# EAGLE board Schem_5_breakout (EAGLE 9.2.1)
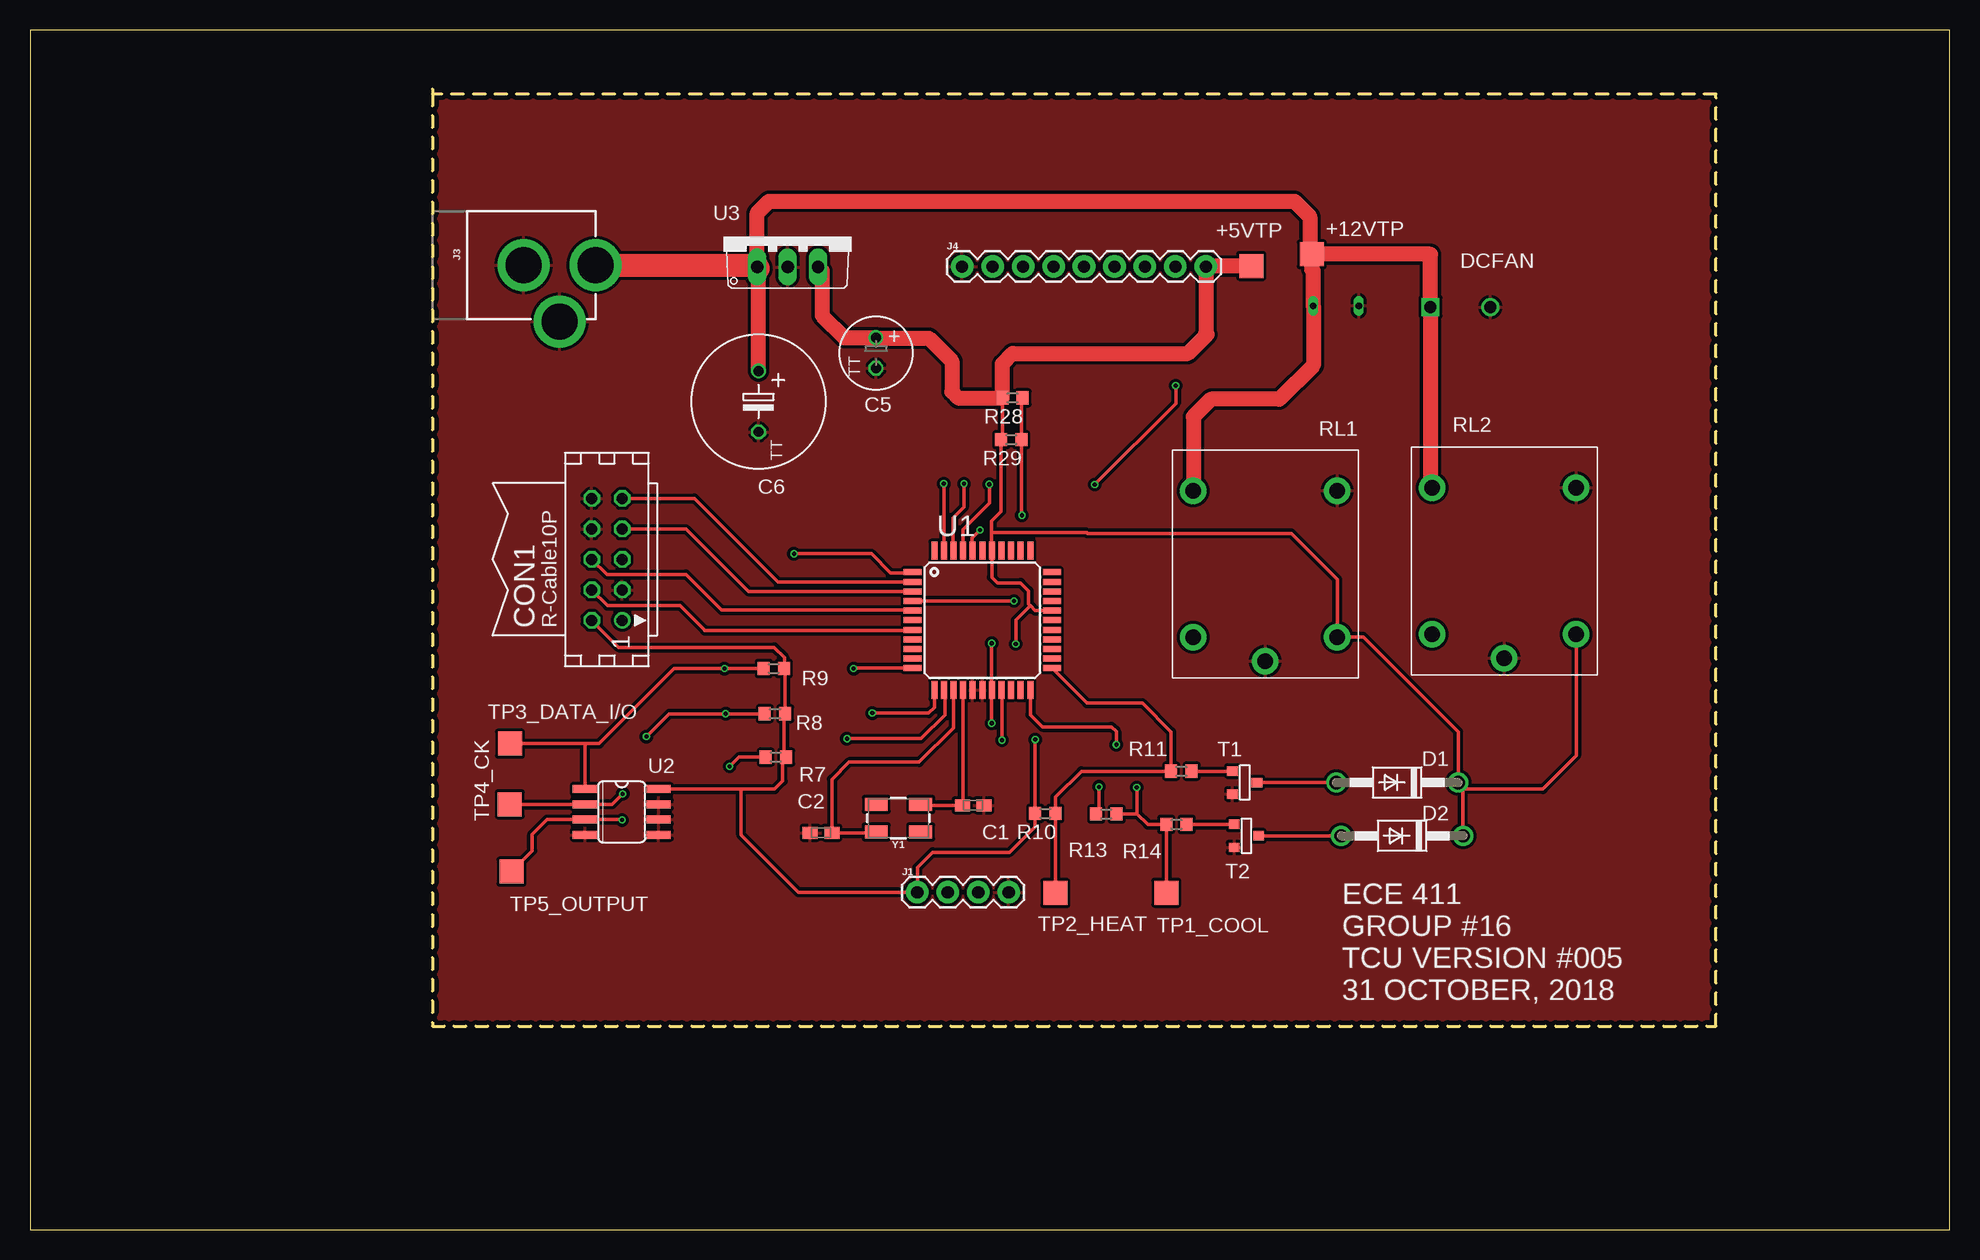
[diagram p0: board, top side]
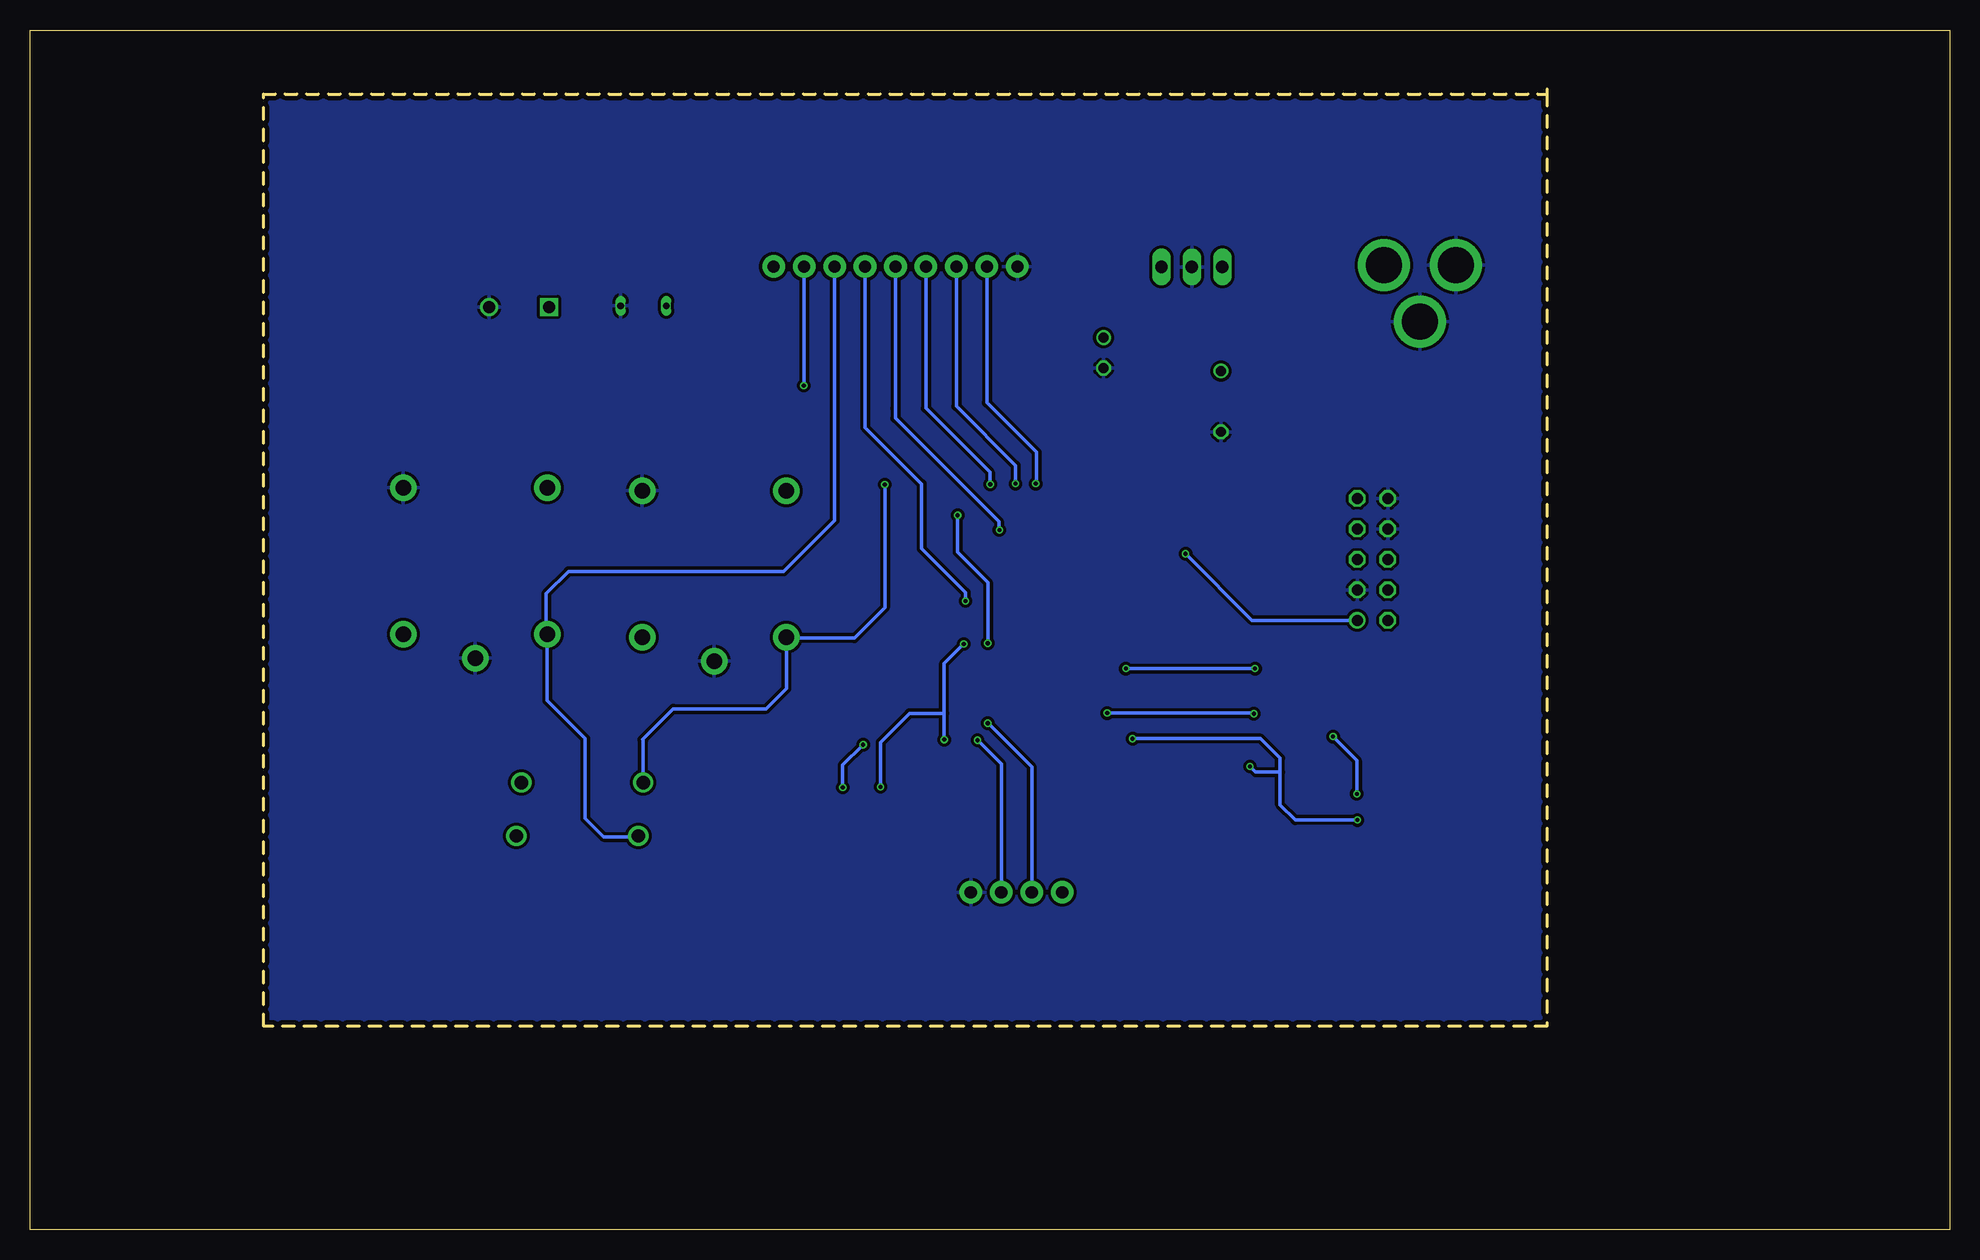
[diagram p1: board, bottom side, seen from below]

Size 160 x 100 mm. Coordinates in mm from the lower left corner, seen from the top.
Outline: 33.55,95.1 33.55,94.67
Outline: 33.55,94.67 33.55,16.94 140.54,16.94 140.54,94.67 33.55,94.67
Outline: 0,0 160,0 160,100 0,100 0,0
Copper layers (1*16): Top 0.035559375mm / dielectric 1.6mm / Bottom 0.035559375mm
Design rules "2LAYER": minimum track width 6mil, minimum drill 10mil, track to track 6mil, track to pad 6mil, pad to pad 6mil, via to via 6mil, smd to smd 6mil, copper to edge 15mil, drill to drill 6mil, minimum pad ring 5mil, minimum via ring 5mil, stop-mask expansion 2.5mil, vias tented up to drill 0mil, thermal gap 10mil

## Footprints (pad centres in the part's own frame; a part is rotated, then mirrored left to right if it is on the bottom)
TP20SQ = smd 2 x 2: TP 0,0
RESC0603_M = smd 1.25 x 1: 1 -0.9,0; 2 0.9,0
TT2D6 = drill 0.813: + -1.27,0 | drill 0.813 octagon: - 1.27,0
TT5D11 = drill 0.813: + -2.54,0 | drill 0.813 octagon: - 2.54,0
CON10 = drill 0.914: 1 -5.08,-1.27 | drill 0.914 octagon: 2 -5.08,1.27; 3 -2.54,-1.27; 4 -2.54,1.27; 5 0,-1.27; 6 0,1.27; 7 2.54,-1.27; 8 2.54,1.27; 9 5.08,-1.27; 10 5.08,1.27
DO41-10 = drill 1.118: A 5.08,0; C -5.08,0
FAN = drill 1 square: + -2.5,0 | drill 1: - 2.5,0
1X04 = drill 1.016 pad 1.88: 1 0,0; 2 2.54,0; 3 5.08,0; 4 7.62,0
POWER_JACK_PTH = drill 2.997 pad 4.318: GND 0,7.7; GNDBREAK 4.7,10.7; PWR 0,13.7
1X09 = drill 1.016 pad 1.88: 1 0,0; 2 2.54,0; 3 5.08,0; 4 7.62,0; 5 10.16,0; 6 12.7,0; 7 15.24,0; 8 17.78,0; 9 20.32,0
R0603 = smd 1 x 1.1: 1 -0.85,0; 2 0.85,0
T073 = drill 1.3 pad 2.2: 1 6.1,6; 2 6.1,-6; 3 8.1,0; 4 -6.1,6; 5 -6.1,-6
SOT-23 = smd 0.787 x 0.889: 1 0.025,-1.016; 2 -0.94,1.016; 3 0.991,1.016
TQFP44 = smd 1.5 x 0.5: 1 -5.8,4; 2 -5.8,3.2; 3 -5.8,2.4; 4 -5.8,1.6; 5 -5.8,0.8; 6 -5.8,0; 7 -5.8,-0.8; 8 -5.8,-1.6; 9 -5.8,-2.4; 10 -5.8,-3.2; 11 -5.8,-4; 23 5.8,-4; 24 5.8,-3.2; 25 5.8,-2.4; 26 5.8,-1.6; 27 5.8,-0.8; 28 5.8,0; 29 5.8,0.8; 30 5.8,1.6; 31 5.8,2.4; 32 5.8,3.2; 33 5.8,4 | smd 0.5 x 1.5: 12 -4,-5.8; 13 -3.2,-5.8; 14 -2.4,-5.8; 15 -1.6,-5.8; 16 -0.8,-5.8; 17 0,-5.8; 18 0.8,-5.8; 19 1.6,-5.8; 20 2.4,-5.8; 21 3.2,-5.8; 22 4,-5.8; 34 4,5.8; 35 3.2,5.8; 36 2.4,5.8; 37 1.6,5.8; 38 0.8,5.8; 39 0,5.8; 40 -0.8,5.8; 41 -1.6,5.8; 42 -2.4,5.8; 43 -3.2,5.8; 44 -4,5.8
SO08 = smd 0.66 x 2.032: 1 -1.905,-3.073; 2 -0.635,-3.073; 3 0.635,-3.073; 4 1.905,-3.073; 5 1.905,3.073; 6 0.635,3.073; 7 -0.635,3.073; 8 -1.905,3.073
TO220V = drill 1.016 long: 1 -2.54,-2.54; 2 0,-2.54; 3 2.54,-2.54
JUMPER2 = drill 0.55 long: 1 0,3.81; 2 0,0
CRYSTAL-SMD-5X3.2-4PAD = smd 1.9 x 1.1: 1 -1.85,-1.15; 2 1.85,-1.15; 3 1.85,1.15; 4 -1.85,1.15

## Placement (x,y rotation side)
+5VTP  TPSTP20SQ  [TP20SQ]  101.81,80.33 0 top
+12VTP  TPSTP20SQ  [TP20SQ]  106.84,81.3 0 top
C1  27 pF  [RESC0603_M]  78.61,35.37 180 top
C2  27 pF  [RESC0603_M]  65.93,33.08 0 top
C5  10 uF  [TT2D6]  70.52,73.08 270 top
C6  470 uF  [TT5D11]  60.73,69.03 270 top
CON1  TEC 5103308-01  [CON10]  48.1,55.87 90 top
D1  1N4004  [DO41-10]  113.97,37.27 180 top
D2  1N4004  [DO41-10]  114.38,32.81 180 top
DCFAN  FAN  [FAN]  119.24,76.91 0 top
J1  [1X04]  73.96,28.11 0 top
J3  POWER_JACK  [POWER_JACK_PTH]  33.45,80.4 270 top
J4  [1X09]  77.69,80.28 0 top
R7  10k  [R0603]  62.17,39.38 180 top
R8  10k  [R0603]  62.09,43 180 top
R9  10k  [R0603]  62,46.77 180 top
R10  1K  [R0603]  84.62,34.68 180 top
R11  2.2K  [R0603]  95.97,38.21 180 top
R13  1K  [R0603]  89.71,34.63 180 top
R14  2.2K  [R0603]  95.56,33.77 180 top
R28  10k  [R0603]  81.89,69.33 180 top
R29  10k  [R0603]  81.79,65.84 180 top
RL1  JQC-3F  [T073]  102.97,55.49 270 top
RL2  JQC-3F  [T073]  122.89,55.74 270 top
T1  2N2222  [SOT-23]  101.25,37.24 90 top
T2  2N2222  [SOT-23]  101.39,32.79 90 top
TP1_COOL  TPSTP20SQ  [TP20SQ]  94.71,28.07 0 top
TP2_HEAT  TPSTP20SQ  [TP20SQ]  85.48,28.06 0 top
TP3_DATA_I/O  TPSTP20SQ  [TP20SQ]  40,40.51 180 top
TP4_CK  TPSTP20SQ  [TP20SQ]  39.99,35.44 180 top
TP5_OUTPUT  TPSTP20SQ  [TP20SQ]  40.13,29.84 0 top
U1  AT89S52  [TQFP44]  79.38,50.8 0 top
U2  DS1621S  [SO08]  49.33,34.81 270 top
U3  7805TV  [TO220V]  63.16,82.78 0 top
U$18  LIGHTBULB  [JUMPER2]  110.77,77.02 90 top
Y1  12MHz  [CRYSTAL-SMD-5X3.2-4PAD]  72.39,34.29 180 top

## Library data of the parts
+5VTP +12VTP TP1_COOL TP2_HEAT TP3_DATA_I/O TP4_CK TP5_OUTPUT = testpad
C1 C2 = Nordic_nRF
C5 C6 = rcl; SPICEPREFIX: C
CON1 = con-harting; OC_FARNELL: unknown; OC_NEWARK: unknown
D1 D2 = diode
DCFAN = FAN
J1 = SparkFun-Connectors; PROD_ID: CONN-09696
J3 = SparkFun-Connectors; PROD_ID: CONN-08197
J4 = SparkFun-Connectors
R7-R11 R13 R14 R28 R29 = audio amplifier example
RL1 RL2 = JQC-3F
T1 T2 = zetex; MPN: DSS20201L-7; OC_FARNELL: 1710688; OC_NEWARK: 25R4555
U1 = atmel; OC_FARNELL: unknown; OC_NEWARK: unknown
U2 = maxim; MF: DALLAS SEMICONDUCTOR; MPN: DS1621S+; OC_FARNELL: 9725261; OC_NEWARK: 23K3501
U3 = linear
U$18 = LIGHTBULB
Y1 = SparkFun-Clocks; PROD_ID: XTAL-08297

## Nets
+5V: +5VTP.TP C5.+ CON1.2 D1.C D2.C J1.1 J4.9 R7.1 R8.1 R9.1 R10.2 R13.2 R28.2 R29.2 RL1.1 RL2.1 U1.29 U1.38 U2.8 U3.3
+12V: +12VTP.TP C6.+ DCFAN.+ J3.PWR RL1.5 RL2.5 U3.1 U$18.1
FANLED: D2.A J4.7 RL2.2 T2.1
GND: C1.1 C2.1 C5.- C6.- CON1.3 CON1.8 CON1.10 DCFAN.- J1.4 J3.GND J3.GNDBREAK J4.1 RL1.3 RL1.4 RL2.3 RL2.4 T1.2 T2.2 U1.16 U1.17 U2.4 U2.5 U2.6 U2.7 U3.2 U$18.2
LBLED: D1.A J4.8 RL1.2 T1.1
MISO: CON1.9 U1.2
MOSI: CON1.1 U1.1
N$1: C1.2 U1.15 Y1.1
N$2: C2.2 U1.14 Y1.3
N$3: J1.2 R28.1 R29.1 U1.18
N$4: J1.3 U1.19
N$9: R7.2 TP5_OUTPUT.TP U1.13 U2.3
N$10: R8.2 TP4_CK.TP U1.12 U2.2
N$11: R9.2 TP3_DATA_I/O.TP U1.11 U2.1
N$12: R10.1 R11.2 TP2_HEAT.TP U1.23
N$13: R11.1 T1.3
N$16: R13.1 R14.2 TP1_COOL.TP U1.22
N$17: R14.1 T2.3
N$33: J4.6 U1.4
N$34: J4.5 U1.40
N$35: J4.4 U1.41
N$36: J4.3 U1.42
N$37: J4.2 U1.43
RST: CON1.5
RXD: CON1.6 U1.5
SCK: CON1.7 U1.3
TXD: CON1.4 U1.7

## Tracks (layer width: path | path; a pad name or v marks a point on that pad's centre or on a via)
+5V  (via drill 0.35)
  Top 0.305: 80.16,58.09 80.16,59.08 80.94,59.86 R29.2 81.05,65.95 R28.2 | 80.16,58.09 80.16,56.61 U1.38 80.17,54.37 80.64,53.9 82.58,53.9 83.24,53.24 83.24,52.15 83.38,52.01 | 80.16,58.09 88.09,58.09 88.14,58.04 105.13,58.04 108.97,54.2 RL1.1 108.98,49.4 111.12,49.4 119.05,41.48 D1.C | U1.29 83.78,51.6 83.38,52.01 | CON1.2 49.08,48.54 62.03,48.54 62.89,47.68 62.89,46.81 R9.1 62.95,46.68 R8.1 62.84,42.9 62.84,39.56 | 62.84,39.56 62.95,39.46 R7.1 | 62.84,39.56 62.74,39.66 62.74,37.39 62.07,36.72 59.21,36.72 | U2.8 59.21,36.72 | 59.21,36.72 59.28,36.64 59.28,32.89 64.06,28.11 J1.1 73.96,30.17 75.23,31.45 81.64,31.45 83.77,33.58 R10.2 83.77,40.82 v83.8,40.84 | v82.17,48.82 82.17,50.8 83.38,52.01 | v89.1,36.91 89.1,34.88 R13.2 | D2.C 119.45,37.27 D1.C | RL2.1 128.88,39.5 126.11,36.73 119.58,36.73 D1.C
  Top 1.27: U3.3 66.04,79.91 66.04,76.2 67.89,74.35 C5.+ 70.57,74.3 74.93,74.3 76.83,72.39 76.83,69.85 77.36,69.33 R28.2 81.05,72.16 81.92,73.03 96.52,73.03 98.11,74.61 98.02,74.7 J4.9 98.06,80.33 +5VTP.TP
  Bottom 0.305: v83.8,40.84 83.8,43.03 | 83.8,43.03 83.8,47.19 v82.17,48.82 | 83.8,43.03 86.69,43.03 89.1,40.62 v89.1,36.91
+12V
  Top 1.27: C6.+ 60.73,80.14 U3.1 60.62,84.75 61.59,85.72 105.41,85.72 106.68,84.45 106.68,81.46 +12VTP.TP | +12VTP.TP 106.84,80.03 106.96,79.91 U$18.1 106.96,72.03 104.14,69.22 98.42,69.22 96.97,67.76 RL1.5 | RL2.5 117.02,61.98 116.74,61.98 DCFAN.+ 116.74,81.3 +12VTP.TP
  Top 1.905: J3.PWR 60.47,80.4 60.73,80.14
FANLED
  Top 0.305: T2.1 D2.A
  Bottom 0.305: J4.7 92.94,59.11 97.18,54.86 115.11,54.86 116.97,53.01 116.97,49.72 RL2.2 116.89,44.09 113.72,40.92 113.72,34.27 112.19,32.74 109.12,32.74 109.07,32.79 109.27,32.79 D2.A
GND
  pour Bottom (isolate 0.254): 31.18,95.98 31.18,15.64 141.63,15.64 141.63,96.2 31.18,96.2
  pour Top (isolate 0.254): 32.79,16.13 141.4,16.13 141.4,20.9 141.4,95.55 140.74,95.55 32.79,95.55 32.79,95
LBLED  (via drill 0.35)
  Top 0.305: v95.5,70.36 95.5,68.86 v88.75,62.1 | D1.A T1.1
  Bottom 0.305: J4.8 95.47,70.39 v95.5,70.36 | v88.75,62.1 88.75,51.84 91.29,49.3 96.88,49.3 96.9,49.32 | 96.9,49.32 RL1.2 | D1.A 108.89,40.79 108.94,40.84 106.38,43.41 98.63,43.41 96.95,45.09 96.95,49.28 96.9,49.32
MISO
  Top 0.305: CON1.9 55.39,60.95 62.36,53.98 73.55,53.98 U1.2
MOSI  (via drill 0.35)
  Top 0.305: v63.68,56.34 70.13,56.34 71.73,54.74 73.51,54.74 U1.1
  Bottom 0.305: CON1.1 58.13,50.78 v63.68,56.34
N$1
  Top 0.305: Y1.1 74.31,35.37 C1.2 77.78,35.44 U1.15
N$2
  Top 0.305: Y1.3 70.48,33.08 C2.2 66.83,37.52 68.28,38.96 74.12,38.96 76.97,41.82 U1.14
N$3  (via drill 0.35)
  Top 0.305: v82.68,59.54 82.64,59.58 R29.1 82.64,69.33 R28.1 | v80.16,48.87 80.16,45.01 | 80.16,45.01 U1.18 | v80.16,42.22 80.16,45.01
  Bottom 0.305: v82.68,59.54 82.68,56.46 80.16,53.95 v80.16,48.87 | J1.2 76.5,38.55 v80.16,42.22
N$4  (via drill 0.35)
  Top 0.305: v81.03,40.79 81.03,44.95 U1.19
  Bottom 0.305: J1.3 79.04,38.81 v81.03,40.79
N$9  (via drill 0.35)
  Top 0.305: TP5_OUTPUT.TP 41.86,31.58 41.86,32.94 43.09,34.18 U2.3 49.31,34.18 v49.35,34.14 | v68.1,40.92 74.27,40.92 76.25,42.9 76.25,44.92 U1.13 | R7.2 59.09,39.38 v58.32,38.61
  Bottom 0.305: v49.35,34.14 54.53,34.14 55.8,35.41 55.8,38.12 | 55.8,38.12 55.8,39.29 57.43,40.92 v68.1,40.92 | v58.32,38.61 57.84,38.12 55.8,38.12
N$10  (via drill 0.35)
  Top 0.305: TP4_CK.TP U2.2 | U2.2 | R8.2 v57.99,43 53.29,43 v51.38,41.1 | v49.4,36.32 48.53,35.45 U2.2 | U1.12 75.38,43.52 74.91,43.05 v70.21,43.05
  Bottom 0.305: v51.38,41.1 49.4,39.12 v49.4,36.32 | v70.21,43.05 58.04,43.05 v57.99,43
N$11  (via drill 0.35)
  Top 0.305: TP3_DATA_I/O.TP 46.3,40.52 | 46.3,40.52 47.45,40.52 53.7,46.76 v57.89,46.76 R9.2 | U2.1 46.25,40.46 46.3,40.52 | U1.11 68.69,46.8 v68.66,46.76
  Bottom 0.305: v68.66,46.76 v57.89,46.76
N$12
  Top 0.305: TP2_HEAT.TP R10.1 85.47,36.04 87.63,38.21 R11.2 95.11,41.49 92.71,43.89 88.08,43.89 U1.23
N$13
  Top 0.305: R11.1 100.22,38.21 T1.3
N$16  (via drill 0.35)
  Top 0.305: TP1_COOL.TP R14.2 94.7,33.76 93.17,33.76 92.29,34.63 | R13.1 92.29,34.63 | U1.22 83.38,42.91 84.38,41.91 90.14,41.91 90.55,41.5 v90.55,40.41 | v92.25,36.85 92.25,34.67 92.29,34.63
  Bottom 0.305: v90.55,40.41 92.25,38.71 v92.25,36.85
N$17
  Top 0.305: R14.1 100.36,33.77 T2.3
N$33  (via drill 0.35)
  Top 0.305: v82.02,52.4 U1.4 | U1.4
  Bottom 0.305: J4.6 90.39,66.88 85.67,62.15 85.67,56.77 82.02,53.11 v82.02,52.4
N$34  (via drill 0.35)
  Top 0.305: v79.2,58.32 78.54,57.66 78.54,56.64 U1.40
  Bottom 0.305: J4.5 87.86,68.46 87.86,68.45 87.86,67.64 79.25,59.03 79.25,58.37 v79.2,58.32
N$35  (via drill 0.35)
  Top 0.305: v79.96,62.13 79.96,60.55 77.78,58.37 U1.41
  Bottom 0.305: J4.4 85.31,68.47 79.98,63.14 79.98,62.13 v79.96,62.13
N$36  (via drill 0.35)
  Top 0.305: v77.85,62.18 77.85,60.22 76.94,59.31 76.94,56.64 U1.42
  Bottom 0.305: J4.3 82.78,68.63 77.85,63.7 v77.85,62.18
N$37  (via drill 0.35)
  Top 0.305: v76.17,62.18 U1.43 | U1.43
  Bottom 0.305: J4.2 80.23,68.93 76.1,64.8 76.1,62.43 76.22,62.31 76.22,62.23 v76.17,62.18
RXD
  Top 0.305: U1.5 73.51,51.54 73.41,51.64 57.66,51.64 54.69,54.61 48.09,54.61 CON1.6
SCK
  Top 0.305: CON1.7 49.38,58.4 54.69,58.4 59.89,53.19 73.56,53.19 U1.3
TXD
  Top 0.305: U1.7 73.51,49.94 56.24,49.94 56.24,49.99 54.2,52.02 48.14,52.02 CON1.4

## Text on the board
tPlace: ECE 411 / GROUP #16 / TCU VERSION #005 / 31 OCTOBER, 2018